# EAGLE board Board_PCB_v28 (EAGLE 9.7.0)
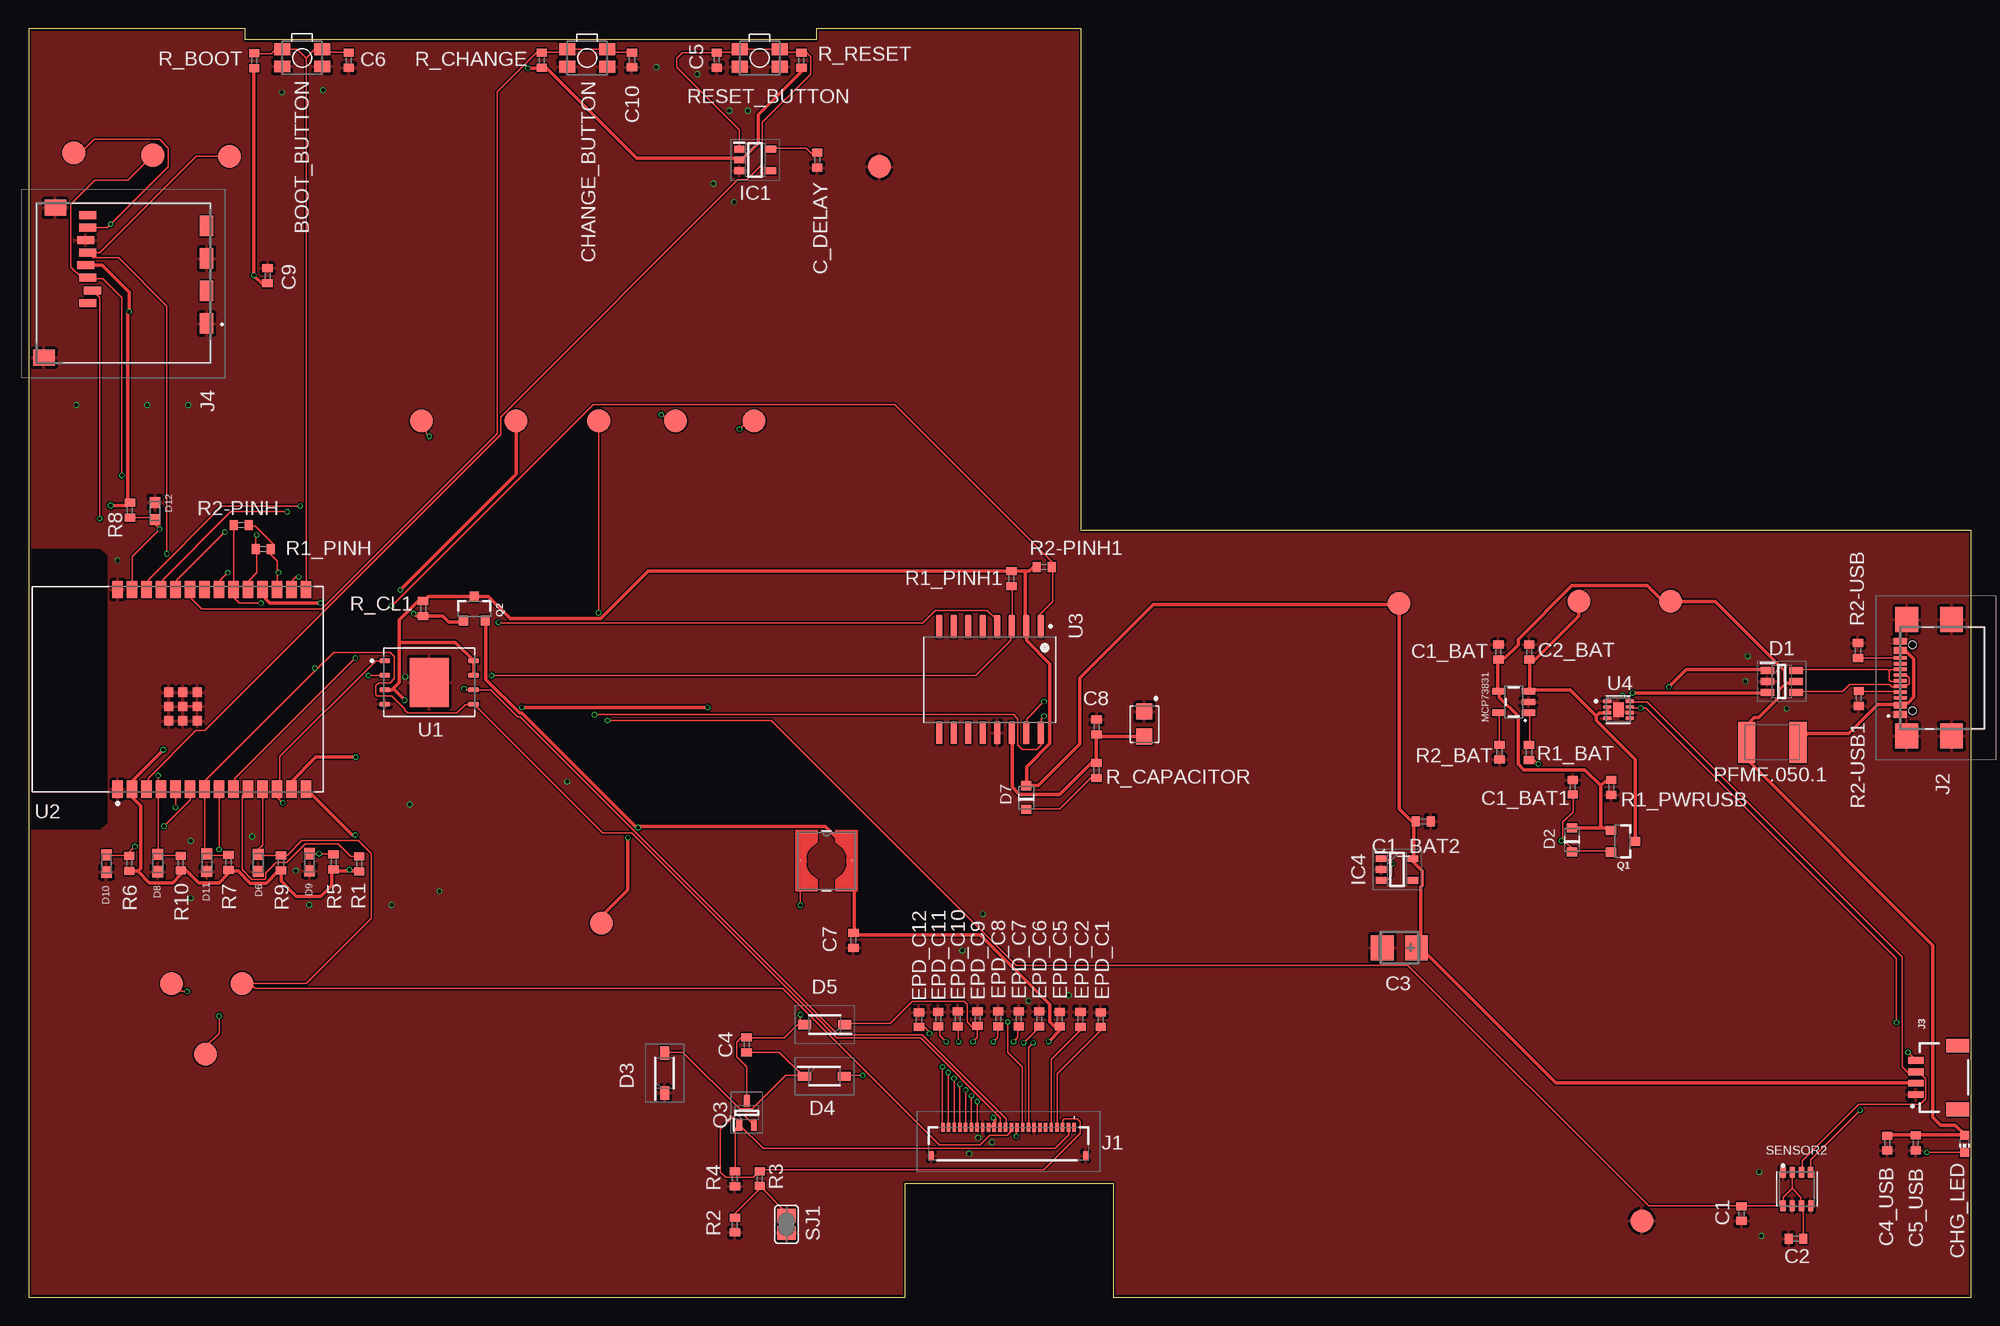
[diagram p0: board, top side]
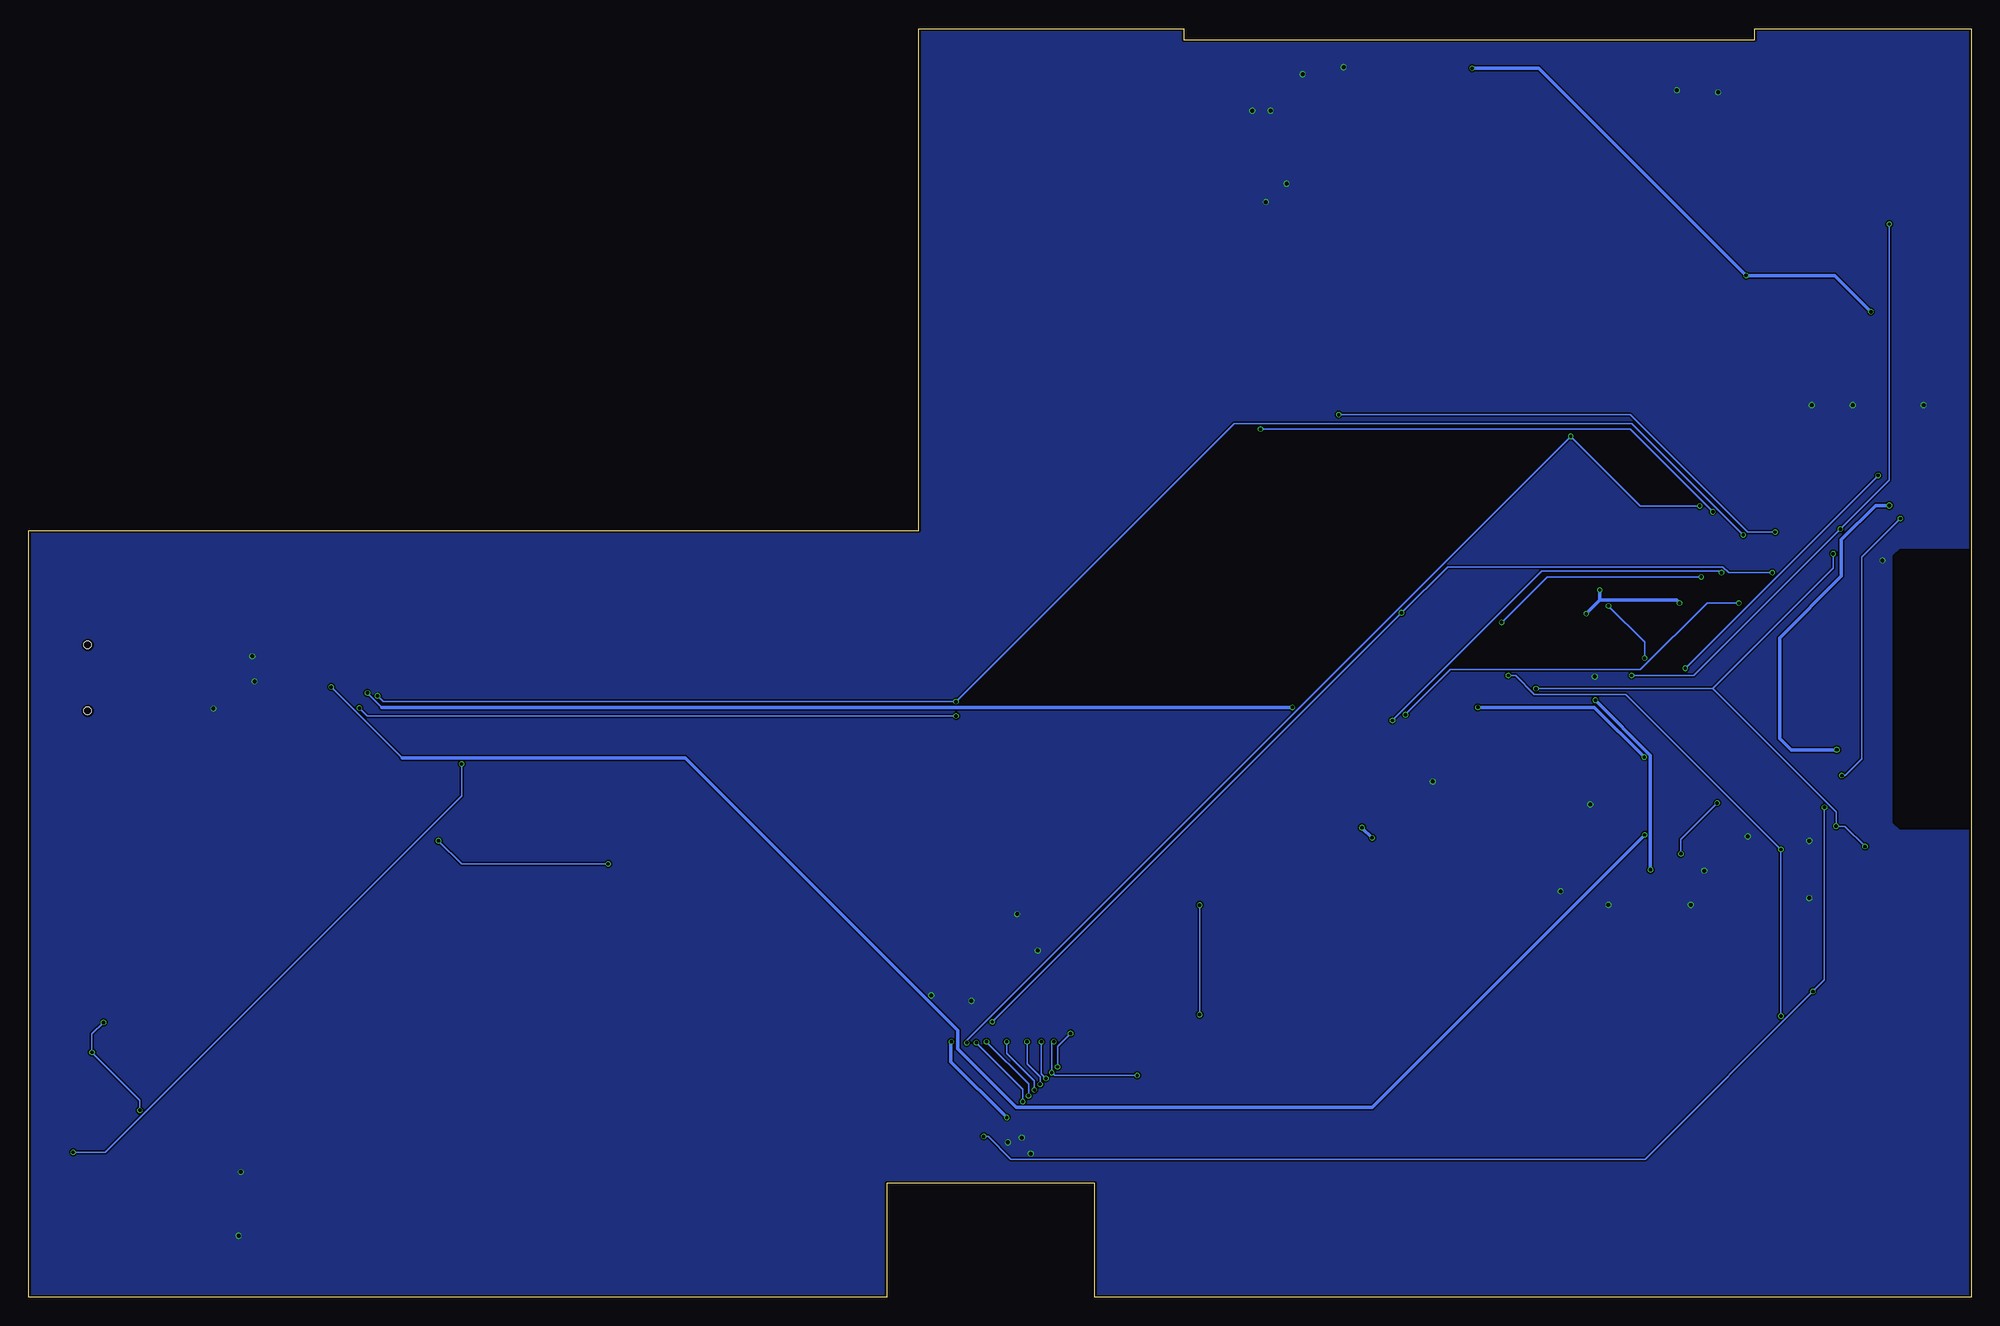
[diagram p1: board, bottom side, seen from below]

Size 170.2 x 111.2 mm. Coordinates in mm from the lower left corner, seen from the top.
Outline: 92.2,111.2 69,111.2 69,110.2 19,110.2 19,111.2 0,111.2 0,0 76.8,0 76.8,10 95,10 95,0 170.2,0 170.2,67.2 92.2,67.2 92.2,111.2
Copper layers (1*16): Top 0.035mm / dielectric 1.6mm / Bottom 0.035mm
Design rules "jlcpcb-2layers": minimum track width 5mil, minimum drill 0.3mm, track to track 5mil, track to pad 5mil, pad to pad 5mil, via to via 5mil, smd to smd 5mil, copper to edge 0.2mm, drill to drill 6mil, minimum pad ring 10mil, minimum via ring 3mil, stop-mask expansion 4mil, vias tented up to drill 0mil, thermal gap 10mil

## Footprints (pad centres in the part's own frame; a part is rotated, then mirrored left to right if it is on the bottom)
MYBUTTON = smd 1.4 x 1.05: 1 1.75,0.75; 2 -1.75,0.75; 3 -1.75,-0.75; 4 1.75,-0.75
EAGLE-LTSPICE_C0402 = smd 0.7 x 0.9: 1 -0.65,0; 2 0.65,0
RCL_CT3528 = smd 2 x 2.2: + -1.5,0; - 1.5,0
CAPCP3225X100N = smd 1.4 x 1.4: 1 -1.1,0; 2 1.1,0
ADAFRUIT_CHIP-LED0603 = smd 0.8 x 0.8: A 0,-0.75; C 0,0.75
SOT95P280X145-6N = smd 1.2 x 0.6: 1 -1.25,0.95; 2 -1.25,0; 3 -1.25,-0.95; 4 1.25,-0.95; 5 1.25,0; 6 1.25,0.95
ESP32_WROVER_AVX---SD0805S020S1R0_AVX_SD0805S020S1R0_0 = smd 0.8 x 0.9: 1 -1.05,0; 2 1.05,0
SOD3716X135N = smd 1.15 x 0.8: 1 -1.75,0; 2 1.75,0
DIOC1608X36N = smd 0.97 x 0.94: 1 -0.75,0; 2 0.75,0
SOT95P280X125-5N = smd 0.9 x 0.6: 1 -1.4,0.95; 2 -1.4,0; 3 -1.4,-0.95; 4 1.4,-0.95; 5 1.4,0.95
SOT95P280X120-5N = smd 0.9 x 0.6: 1 -1.4,0.95; 2 -1.4,0; 3 -1.4,-0.95; 4 1.4,-0.95; 5 1.4,0.95
FH34SRJ24S05SH99 = smd 0.3 x 0.8: 1 5.75,1.45; 2 5.25,1.45; 3 4.75,1.45; 4 4.25,1.45; 5 3.75,1.45; 6 3.25,1.45; 7 2.75,1.45; 8 2.25,1.45; 9 1.75,1.45; 10 1.25,1.45; 11 0.75,1.45; 12 0.25,1.45; 13 -0.25,1.45; 14 -0.75,1.45; 15 -1.25,1.45; 16 -1.75,1.45; 17 -2.25,1.45; 18 -2.75,1.45; 19 -3.25,1.45; 20 -3.75,1.45; 21 -4.25,1.45; 22 -4.75,1.45; 23 -5.25,1.45; 24 -5.75,1.45 | smd 0.4 x 0.8: MP1 6.75,-1.05; MP2 -6.75,-1.05
SAMACSYS_PARTS_USB4110GFA = smd 0.3 x 1.15: A1 -3.35,3.678; A4 -2.55,3.678; A5 -1.25,3.678; A6 -0.25,3.678; A7 0.25,3.678; A8 1.25,3.678; A9 2.55,3.678; A12 3.35,3.678; B1 3.05,3.678; B4 2.25,3.678; B5 1.75,3.678; B6 0.75,3.678; B7 -0.75,3.678; B8 -1.75,3.678; B9 -2.25,3.678; B12 -3.05,3.678 | smd 2.18 x 2: MP1 -5.11,-0.827; MP2 5.11,-0.827; MP3 -5.11,3.103; MP4 5.11,3.103 | hole 0.65: -2.89,2.603; 2.89,2.603
JST04_1MM_RA = smd 0.6 x 1.35: 1 -1.5,0; 2 -0.5,0; 3 0.5,0; 4 1.5,0 | smd 1.2 x 2: NC1 2.8,-3.675; NC2 -2.8,-3.675
112ATAARR03ATTEND = smd 1.8 x 1.2: G1 10.6,10.4; G2 4.9,10.4; S1 7.75,10.4; S2 2.05,10.4 | smd 1.4 x 1.9: G3 13.6,-3.85; G4 0.45,-2.85 | smd 0.7 x 1.5: P1 8.8,0; P2 7.7,0.4; P3 6.6,0; P4 5.5,-0.2; P5 4.4,0; P6 3.3,-0.2; P7 2.2,0; P8 1.1,0
IND_4828-WE-TPC_WRE = smd 0.127 x 0.127: 1 -2.286,0; 2 2.286,0
ESP32_WROVER_SPARKFUN-IC-POWER_SOT23-5 = smd 0.55 x 1.2: 1 -0.95,-1.3; 2 0,-1.3; 3 0.95,-1.3; 4 0.95,1.3; 5 -0.95,1.3
ESP32C6_VARISTOR_CT/CN1812 = smd 1.5 x 3.6: 1 -2.25,0; 2 2.25,0
ESP32_WROVER_SPARKFUN-DISCRETESEMI_SOT23-3 = smd 0.8 x 0.9: 1 -0.95,-1; 2 0.95,-1; 3 0,1.1
SOT65P210X110-3N = smd 1.05 x 0.5: 1 -1.05,0.65; 2 -1.05,-0.65; 3 1.05,0
ESP32_WROVER_EAGLE-LTSPICE_R0402 = smd 0.7 x 0.9: 1 -0.65,0; 2 0.65,0
ESP32_WROVER_BME680_PSON80P300X300X100-8N = smd 1.016 x 0.5: 1 1.458,1.2; 2 1.458,0.4; 3 1.458,-0.4; 4 1.458,-1.2; 5 -1.458,-1.22; 6 -1.458,-0.4; 7 -1.458,0.4; 8 -1.458,1.2
SJ = smd 1.168 x 1.6: 1 -0.762,0; 2 0.762,0
TP20R = smd 2 x 2: TP 0,0
SON127P600X800X80-9N = smd 0.94 x 0.44: 1 -3.895,1.905; 2 -3.895,0.635; 3 -3.895,-0.635; 4 -3.895,-1.905; 5 3.895,-1.905; 6 3.895,-0.635; 7 3.895,0.635; 8 3.895,1.905 | smd 3.4 x 4.3: 9 0,0
XCVR_ESP32-C6-WROOM-1-N8 = smd 1.5 x 0.9: 1 -8.75,5.26; 2 -8.75,3.99; 3 -8.75,2.72; 4 -8.75,1.45; 5 -8.75,0.18; 6 -8.75,-1.09; 7 -8.75,-2.36; 8 -8.75,-3.63; 9 -8.75,-4.9; 10 -8.75,-6.17; 11 -8.75,-7.44; 12 -8.75,-8.71; 13 -8.75,-9.98; 14 -8.75,-11.25; 15 8.75,-11.25; 16 8.75,-9.98; 17 8.75,-8.71; 18 8.75,-7.44; 19 8.75,-6.17; 20 8.75,-4.9; 21 8.75,-3.63; 22 8.75,-2.36; 23 8.75,-1.09; 24 8.75,0.18; 25 8.75,1.45; 26 8.75,2.72; 27 8.75,3.99; 28 8.75,5.26 | smd 0.8 x 0.8: 29_1 -2.755,0.79; 29_2 -1.505,0.79; 29_3 -0.255,0.79; 29_4 -2.755,-0.46; 29_5 -1.505,-0.46; 29_6 -0.255,-0.46; 29_7 -2.755,-1.71; 29_8 -1.505,-1.71; 29_9 -0.255,-1.71
SOIC127P1032X265-16N = smd 2.05 x 0.59: 1 -4.655,4.445; 2 -4.655,3.175; 3 -4.655,1.905; 4 -4.655,0.635; 5 -4.655,-0.635; 6 -4.655,-1.905; 7 -4.655,-3.175; 8 -4.655,-4.445; 9 4.655,-4.445; 10 4.655,-3.175; 11 4.655,-1.905; 12 4.655,-0.635; 13 4.655,0.635; 14 4.655,1.905; 15 4.655,3.175; 16 4.655,4.445
SON50P200X200X80-9N = smd 0.76 x 0.27: 1 -0.985,0.75; 2 -0.985,0.25; 3 -0.985,-0.25; 4 -0.985,-0.75; 5 0.985,-0.75; 6 0.985,-0.25; 7 0.985,0.25; 8 0.985,0.75 | smd 0.9 x 1.3: 9 0,0

## Placement (x,y rotation side)
BOOT_BUTTON  BUTTON_CUSYOMV1  [MYBUTTON]  23.97,108.62 180 top
C1  100nF  [EAGLE-LTSPICE_C0402]  150.06,7.35 90 top
C1_BAT  4.7uF  [EAGLE-LTSPICE_C0402]  128.76,56.56 270 top
C1_BAT1  4.7uF  [EAGLE-LTSPICE_C0402]  135.28,44.72 270 top
C1_BAT2  4.7uF  [EAGLE-LTSPICE_C0402]  122.18,41.72 180 top
C2  100nF  [EAGLE-LTSPICE_C0402]  154.83,5.14 0 top
C2_BAT  4.7uF  [EAGLE-LTSPICE_C0402]  131.46,56.55 270 top
C3  100uF TANT  [RCL_CT3528]  120.08,30.65 180 top
C4  4.7uF/25V  [EAGLE-LTSPICE_C0402]  62.9,22.15 270 top
C4_USB  100nF  [EAGLE-LTSPICE_C0402]  162.82,13.53 90 top
C5  1uF  [EAGLE-LTSPICE_C0402]  60.28,108.43 90 top
C5_USB  4.7uF  [EAGLE-LTSPICE_C0402]  165.32,13.54 90 top
C6  100nF  [EAGLE-LTSPICE_C0402]  28.06,108.41 90 top
C7  10uF  [EAGLE-LTSPICE_C0402]  72.26,31.3 90 top
C8  100nF  [EAGLE-LTSPICE_C0402]  93.56,49.99 90 top
C9  100nF  [EAGLE-LTSPICE_C0402]  20.94,89.53 270 top
C10  100nF  [EAGLE-LTSPICE_C0402]  52.86,108.45 90 top
C10_SUPERCAP  CPH3225A  [CAPCP3225X100N]  97.75,50.24 270 top
C_DELAY  100nF  [EAGLE-LTSPICE_C0402]  69.1,99.67 90 top
CHANGE_BUTTON  BUTTON_CUSYOMV1  [MYBUTTON]  48.93,108.62 180 top
CHG_LED  [ADAFRUIT_CHIP-LED0603]  169.6,13.46 180 top
D1  USBLC6-2SC6Y  [SOT95P280X145-6N]  153.58,53.98 0 top
D2  ESP32_WROVER_AVX---SD0805S020S1R0_AVX_SD0805S020S1R0_0_0AVX_SD0805S020S1R0_0_0  [ESP32_WROVER_AVX---SD0805S020S1R0_AVX_SD0805S020S1R0_0]  135.21,40.09 90 top
D3  MBR0530  [SOD3716X135N]  55.72,19.66 90 top
D4  MBR0530  [SOD3716X135N]  69.72,19.39 0 top
D5  MBR0530  [SOD3716X135N]  69.74,23.91 180 top
D6  PGB1010603MR  [DIOC1608X36N]  20.12,38.08 90 top
D7  ESP32_WROVER_AVX---SD0805S020S1R0_AVX_SD0805S020S1R0_0_0AVX_SD0805S020S1R0_0_0  [ESP32_WROVER_AVX---SD0805S020S1R0_AVX_SD0805S020S1R0_0]  87.4,43.8 90 top
D8  PGB1010603MR  [DIOC1608X36N]  11.32,38.06 90 top
D9  PGB1010603MR  [DIOC1608X36N]  24.62,38.14 90 top
D10  PGB1010603MR  [DIOC1608X36N]  6.82,38.02 90 top
D11  PGB1010603MR  [DIOC1608X36N]  15.62,38.1 90 top
D12  PGB1010603MR  [DIOC1608X36N]  11.08,68.92 270 top
EPD_C1  1uF/50V  [EAGLE-LTSPICE_C0402]  93.92,24.35 90 top
EPD_C2  1uF/50V  [EAGLE-LTSPICE_C0402]  92.14,24.38 90 top
EPD_C5  1uF/50V  [EAGLE-LTSPICE_C0402]  90.34,24.39 90 top
EPD_C6  1uF/50V  [EAGLE-LTSPICE_C0402]  88.54,24.4 90 top
EPD_C7  1uF/50V  [EAGLE-LTSPICE_C0402]  86.74,24.41 90 top
EPD_C8  1uF/50V  [EAGLE-LTSPICE_C0402]  84.94,24.42 90 top
EPD_C9  1uF/50V  [EAGLE-LTSPICE_C0402]  83.14,24.43 90 top
EPD_C10  1uF/50V  [EAGLE-LTSPICE_C0402]  81.4,24.41 90 top
EPD_C11  1uF/50V  [EAGLE-LTSPICE_C0402]  79.7,24.39 90 top
EPD_C12  1uF/50V  [EAGLE-LTSPICE_C0402]  78,24.35 90 top
IC1  BD5229G-TR  [SOT95P280X125-5N]  63.65,99.68 0 top
IC4  XC6220A331MR-G  [SOT95P280X120-5N]  119.88,37.5 0 top
J1  FH34SRJ-24S-0.5SH_99_  [FH34SRJ24S05SH99]  85.84,13.45 0 top
J2  SAMACSYS_PARTS_USB4110-GF-A  [SAMACSYS_PARTS_USB4110GFA]  167.63,54.3 90 top
J3  QWIIC_RIGHT_ANGLE  [JST04_1MM_RA]  165.32,19.28 90 top
J4  112A-TAAR-R03_ATTEND  [112ATAARR03ATTEND]  5.2,95.95 270 top
L1  744043680IND_4828-WE-TPC_WRE  [IND_4828-WE-TPC_WRE]  69.9,38.26 0 top
MCP73831  ESP32_WROVER_SPARKFUN-IC-POWER_MCP73831  [ESP32_WROVER_SPARKFUN-IC-POWER_SOT23-5]  130.1,52.18 90 top
PFMF.050.1  ESP32C6_VARISTORCN1812  [ESP32C6_VARISTOR_CT/CN1812]  152.75,48.65 180 top
Q1  20V/4.2A/52mΩ/1.4W  [ESP32_WROVER_SPARKFUN-DISCRETESEMI_SOT23-3]  139.62,39.97 270 top
Q2  20V/4.2A/52mΩ/1.4W  [ESP32_WROVER_SPARKFUN-DISCRETESEMI_SOT23-3]  39.05,60.32 0 top
Q3  SI1308EDL-T1-GE3  [SOT65P210X110-3N]  62.91,16.19 90 top
R1  10K  [ESP32_WROVER_EAGLE-LTSPICE_R0402]  28.98,37.99 90 top
R1_BAT  200  [ESP32_WROVER_EAGLE-LTSPICE_R0402]  131.44,47.76 90 top
R1_PINH  10K  [ESP32_WROVER_EAGLE-LTSPICE_R0402]  20.56,65.58 0 top
R1_PINH1  10K  [ESP32_WROVER_EAGLE-LTSPICE_R0402]  86.1,63.01 90 top
R1_PWRUSB  100K  [ESP32_WROVER_EAGLE-LTSPICE_R0402]  138.65,44.68 270 top
R2  2.2  [ESP32_WROVER_EAGLE-LTSPICE_R0402]  61.88,6.35 90 top
R2-PINH  10K  [ESP32_WROVER_EAGLE-LTSPICE_R0402]  18.62,67.68 0 top
R2-PINH1  10K  [ESP32_WROVER_EAGLE-LTSPICE_R0402]  88.97,64 180 top
R2-USB  5k1  [ESP32_WROVER_EAGLE-LTSPICE_R0402]  160.26,56.69 90 top
R2-USB1  5k1  [ESP32_WROVER_EAGLE-LTSPICE_R0402]  160.32,52.5 90 top
R2_BAT  2k  [ESP32_WROVER_EAGLE-LTSPICE_R0402]  128.86,47.78 90 top
R3  0.47  [ESP32_WROVER_EAGLE-LTSPICE_R0402]  64.06,10.42 90 top
R4  10K  [ESP32_WROVER_EAGLE-LTSPICE_R0402]  61.88,10.41 90 top
R5  10K  [ESP32_WROVER_EAGLE-LTSPICE_R0402]  26.72,38.17 270 top
R6  10K  [ESP32_WROVER_EAGLE-LTSPICE_R0402]  8.82,38.05 270 top
R7  10K  [ESP32_WROVER_EAGLE-LTSPICE_R0402]  17.52,38.13 270 top
R8  10K  [ESP32_WROVER_EAGLE-LTSPICE_R0402]  8.88,68.99 90 top
R9  10K  [ESP32_WROVER_EAGLE-LTSPICE_R0402]  22.12,38.09 270 top
R10  10K  [ESP32_WROVER_EAGLE-LTSPICE_R0402]  13.34,38.06 270 top
R_BOOT  10K  [ESP32_WROVER_EAGLE-LTSPICE_R0402]  19.78,108.39 270 top
R_CAPACITOR  15  [ESP32_WROVER_EAGLE-LTSPICE_R0402]  93.55,46.18 270 top
R_CHANGE  10K  [ESP32_WROVER_EAGLE-LTSPICE_R0402]  44.95,108.41 270 top
R_CL1  10K  [ESP32_WROVER_EAGLE-LTSPICE_R0402]  34.56,60.37 90 top
R_RESET  10K  [ESP32_WROVER_EAGLE-LTSPICE_R0402]  67.7,108.41 270 top
RESET_BUTTON  BUTTON_CUSYOMV1  [MYBUTTON]  64.04,108.62 180 top
SENSOR2  ESP32_WROVER_BME680_BME680  [ESP32_WROVER_BME680_PSON80P300X300X100-8N]  154.9,9.5 90 top
SJ1  [SJ]  66.4,6.41 90 top
TP1  TPTP20R  [TP20R]  63.56,76.8 0 top
TP2  TPTP20R  [TP20R]  56.68,76.8 0 top
TP3  TPTP20R  [TP20R]  135.8,61 0 top
TP4  TPTP20R  [TP20R]  141.32,6.7 0 top
TP5  TPTP20R  [TP20R]  74.54,99.1 0 top
TP6  TPTP20R  [TP20R]  3.96,100.3 0 top
TP7  TPTP20R  [TP20R]  10.88,100.1 0 top
TP8  TPTP20R  [TP20R]  17.6,100 0 top
TP9  TPTP20R  [TP20R]  34.42,76.8 0 top
TP10  TPTP20R  [TP20R]  18.7,27.52 0 top
TP11  TPTP20R  [TP20R]  12.54,27.5 0 top
TP12  TPTP20R  [TP20R]  49.95,76.82 0 top
TP13  TPTP20R  [TP20R]  42.7,76.82 0 top
TP14  TPTP20R  [TP20R]  143.85,61.02 0 top
TP15  TPTP20R  [TP20R]  15.5,21.32 0 top
TP16  TPTP20R  [TP20R]  120.05,60.82 0 top
TP17  TPTP20R  [TP20R]  50.19,32.8 0 top
U1  W25Q512JVEIQ  [SON127P600X800X80-9N]  35.1,53.9 0 top
U2  ESP32-C6-WROOM-1-N8  [XCVR_ESP32-C6-WROOM-1-N8]  13.06,53.29 90 top
U3  DS3231SN#  [SOIC127P1032X265-16N]  84.21,54.14 270 top
U4  MAX17048G+T10  [SON50P200X200X80-9N]  139.27,51.5 0 top

## Library data of the parts
BOOT_BUTTON CHANGE_BUTTON CHG_LED PFMF.050.1 RESET_BUTTON SJ1 TP1-TP17 = DeskAssistant v19 v1
C1 C1_BAT C1_BAT1 C1_BAT2 C2 C2_BAT C4 C4_USB C5 C5_USB C6-C10 C_DELAY EPD_C1 EPD_C2 EPD_C5-EPD_C12 = DeskAssistant v19 v1; SPICEMODEL: NONE; SPICEPREFIX: C
C3 = DeskAssistant v19 v1; SPICEPREFIX: C
C10_SUPERCAP = DeskAssistant v19 v1; AVAILABILITY: Not in stock; CHECK_PRICES: https://www.snapeda.com/parts/CPH3225A/Seiko+Instruments/view-part/?ref=eda; DESCRIPTION: 11 mF (EDLC) Supercapacitor 3.3 V 1210 (3225 Metric) - -; MF: Seiko Instruments; MP: CPH3225A; PACKAGE: 1210 Seiko; PRICE: None; PURCHASE-URL: https://www.snapeda.com/api/url_track_click_mouser/?unipart_id=562593&manufacturer=Seiko Instruments&part_name=CPH3225A&search_term=None; SNAPEDA_LINK: https://www.snapeda.com/parts/CPH3225A/Seiko+Instruments/view-part/?ref=snap
D1 = DeskAssistant v19 v1; AVAILABILITY: In Stock; CHECK_PRICES: https://www.snapeda.com/parts/USBLC6-2SC6Y/STMicroelectronics/view-part/?ref=eda; DESCRIPTION: 17V Clamp 5A (8/20µs) Ipp Tvs Diode Surface Mount SOT-23-6; MF: STMicroelectronics; MP: USBLC6-2SC6Y; PACKAGE: SOT-23-6 STMicroelectronics; PRICE: None; SNAPEDA_LINK: https://www.snapeda.com/parts/USBLC6-2SC6Y/STMicroelectronics/view-part/?ref=snap
D2 = DeskAssistant v19 v1; CENTROID_NOT_SPECIFIED: No; DATASHEET: http://datasheets.avx.com/schottky.pdf; DIGIKEY_DESCRIPTION: DIODE SCHOTTKY 20V 1A 0805; DIGIKEY_PART_NUMBER: 478-7800-1-ND; LEAD_FREE: yes; MF: AVX; MOUSER_PART_NUMBER: 581-SD0805S020S1R0; PACKAGE: 0805 (2012 metric); PREFIX: D; ROHS: yes; SD0805S020S1R0: SD0805S020S1R0; TEMPERATURE_RANGE_HIGH: +125°C; TEMPERATURE_RANGE_LOW: -55°C
D3-D5 = DeskAssistant v19 v1; AVAILABILITY: In Stock; CHECK_PRICES: https://www.snapeda.com/parts/MBR0530/Onsemi/view-part/?ref=eda; DESCRIPTION: Diode Schottky 30 V 500mA Surface Mount SOD-123; MF: ON Semiconductor; MP: MBR0530; PACKAGE: SOD-123-2 ON Semiconductor; PRICE: None; PURCHASE-URL: https://www.snapeda.com/api/url_track_click_mouser/?unipart_id=179458&manufacturer=ON Semiconductor&part_name=MBR0530&search_term=None; SNAPEDA_LINK: https://www.snapeda.com/parts/MBR0530/Onsemi/view-part/?ref=snap
D6 D8-D12 = DeskAssistant v19 v1; AVAILABILITY: In Stock; CHECK_PRICES: https://www.snapeda.com/parts/PGB1010603MR/Littelfuse/view-part/?ref=eda; DESCRIPTION: 150V (Typ) Clamp - Ipp Tvs Diode Surface Mount 0603 (1608 Metric); MF: Littelfuse Inc.; MP: PGB1010603MR; PACKAGE: 0603 Littelfuse Inc.; PRICE: None; PURCHASE-URL: https://www.snapeda.com/api/url_track_click_mouser/?unipart_id=5659453&manufacturer=Littelfuse Inc.&part_name=PGB1010603MR&search_term=None; SNAPEDA_LINK: https://www.snapeda.com/parts/PGB1010603MR/Littelfuse/view-part/?ref=snap
D7 = DeskAssistant v19 v1; CENTROID_NOT_SPECIFIED: No; DATASHEET: http://datasheets.avx.com/schottky.pdf; DIGIKEY_DESCRIPTION: DIODE SCHOTTKY 20V 1A 0805; DIGIKEY_PART_NUMBER: 478-7800-1-ND; DIODE: SD0805S020S1R0; LEAD_FREE: yes; MF: AVX; MOUSER_PART_NUMBER: 581-SD0805S020S1R0; PACKAGE: 0805 (2012 metric); PREFIX: D; ROHS: yes; TEMPERATURE_RANGE_HIGH: +125°C; TEMPERATURE_RANGE_LOW: -55°C
IC1 = DeskAssistant v19 v1; DESCRIPTION: Voltage Detector with Adjustable Delay Time: CMOS processes are utilized to develop high precision, low current consumption CMOS reset ICs that allow arbitrary setting of the delay time. The extensive lineup includes both Nch Open Drain and CMOS output types in a wide range of detection voltages (from 2.3V to 6.0V, in 0.1V steps), enabling selection of the ideal solution based on customer requirements. In addition, the entire series is of course both lead-free and RoHS-compliant.; HEIGHT: 1.25mm; MANUFACTURER_NAME: ROHM Semiconductor; MANUFACTURER_PART_NUMBER: BD5229G-TR; MOUSER_PART_NUMBER: 755-BD5229G-TR; MOUSER_PRICE-STOCK: https://www.mouser.co.uk/ProductDetail/ROHM-Semiconductor/BD5229G-TR?qs=4kLU8WoGk0vvnhrrYwdszw%3D%3D
IC4 = DeskAssistant v19 v1; DESCRIPTION: LDO Voltage Regulators; HEIGHT: 1.2mm; MANUFACTURER_NAME: Torex; MANUFACTURER_PART_NUMBER: XC6220A331MR-G; MOUSER_PART_NUMBER: 865-XC6220A331MR-G; MOUSER_PRICE-STOCK: https://www.mouser.co.uk/ProductDetail/Torex-Semiconductor/XC6220A331MR-G?qs=AsjdqWjXhJ8ZSWznL1J0gg%3D%3D
J1 = DeskAssistant v19 v1; DESCRIPTION: 24 Position FFC, FPC Connector Contacts, Top and Bottom 0.020" (0.50mm) Surface Mount, Right Angle; HEIGHT: 1.1mm; MANUFACTURER_NAME: Hirose; MANUFACTURER_PART_NUMBER: FH34SRJ-24S-0.5SH(99); MOUSER_PART_NUMBER: 798-FH34SRJ24S05SH99; MOUSER_PRICE-STOCK: https://www.mouser.co.uk/ProductDetail/Hirose-Connector/FH34SRJ-24S-0.5SH99?qs=vcbW%252B4%252BSTIpKBl5ap9J8Fw%3D%3D
J2 = DeskAssistant v19 v1; DESCRIPTION: CONN USB 2.0 TYPE-C R/A SMT; HEIGHT: 3.26mm; MANUFACTURER_NAME: GCT (GLOBAL CONNECTOR TECHNOLOGY); MANUFACTURER_PART_NUMBER: USB4110-GF-A; MOUSER_PART_NUMBER: 640-USB4110-GF-A; MOUSER_PRICE-STOCK: https://www.mouser.co.uk/ProductDetail/GCT/USB4110-GF-A?qs=KUoIvG%2F9IlYiZvIXQjyJeA%3D%3D
J3 = DeskAssistant v19 v1; PROD_ID: CONN-13694
J4 = DeskAssistant v19 v1; DESCRIPTION: Micro SD Card Socket, Push-Push Type, Top Mount, SMT, H=1.83mm, 10u; HEIGHT: 1.9mm; MANUFACTURER_NAME: ATTEND; MANUFACTURER_PART_NUMBER: 112A-TAAR-R03 ATTEND
L1 = DeskAssistant v19 v1; COPYRIGHT: Copyright (C) 2024 Ultra Librarian. All rights reserved.; L1: 68uH; MANUFACTURER_PART_NUMBER: 744043680; MFR_NAME: Wurth Electronics
MCP73831 = DeskAssistant v19 v1; PROD_ID: IC-09995
Q1 = DeskAssistant v19 v1; DMG2305UX-7: DMG2305UX-7; PROD_ID: TRAN-14388
Q2 = DeskAssistant v19 v1; PROD_ID: TRAN-14388
Q3 = DeskAssistant v19 v1; AVAILABILITY: In Stock; CHECK_PRICES: https://www.snapeda.com/parts/SI1308EDL-T1-GE3/Vishay+Siliconix/view-part/?ref=eda; DESCRIPTION: Si1308EDL-T1-GE3 N-channel MOSFET Transistor, 1.5 A, 30 V, 3-Pin SC-70 | Siliconix / Vishay SI1308EDL-T1-GE3; MF: Vishay Siliconix; MP: SI1308EDL-T1-GE3; PACKAGE: SOT-323 Vishay Semiconductor; PRICE: None; PURCHASE-URL: https://www.snapeda.com/api/url_track_click_mouser/?unipart_id=274603&manufacturer=Vishay Siliconix&part_name=SI1308EDL-T1-GE3&search_term=None; SNAPEDA_LINK: https://www.snapeda.com/parts/SI1308EDL-T1-GE3/Vishay+Siliconix/view-part/?ref=snap
R1 R1_BAT R1_PINH R1_PINH1 R1_PWRUSB R2 R2-PINH R2-PINH1 R2-USB R2-USB1 R2_BAT R3-R10 R_BOOT R_CAPACITOR R_CHANGE R_CL1 R_RESET = DeskAssistant v19 v1; SPICEMODEL: NONE; SPICEPREFIX: R
SENSOR2 = DeskAssistant v19 v1; AVAILABILITY: Unavailable; DESCRIPTION: Integrated Environmental Unit; MF: Bosch Sensortec; MP: BME680; MP1: BME688; PACKAGE: LGA-8 Bosch Tools; PRICE: None
U1 = DeskAssistant v19 v1; AVAILABILITY: In Stock; CHECK_PRICES: https://www.snapeda.com/parts/W25Q512JVEIQ/Winbond+Electronics/view-part/?ref=eda; DESCRIPTION: FLASH - NOR Memory IC 512Mb (64M x 8) SPI - Quad I/O 133 MHz 8-WSON (8x6); MF: Winbond Electronics; MP: W25Q512JVEIQ; PACKAGE: Package; PRICE: None; SNAPEDA_LINK: https://www.snapeda.com/parts/W25Q512JVEIQ/Winbond+Electronics/view-part/?ref=snap
U2 = DeskAssistant v19 v1; AVAILABILITY: In Stock; CHECK_PRICES: https://www.snapeda.com/parts/ESP32-C6-WROOM-1-N8/Espressif+Systems/view-part/?ref=eda; DESCRIPTION: Multiprotocol Modules ESP32-C6 module, Wi-Fi 6 in 2.4 GHz band, Bluetooth 5, Zigbee 3.0 and Thread. ESP34-WROOM Compatible - ENGINEERING SAMPLE; MF: Espressif Systems; MP: ESP32-C6-WROOM-1-N8; PACKAGE: None; PRICE: None; SNAPEDA_LINK: https://www.snapeda.com/parts/ESP32-C6-WROOM-1-N8/Espressif+Systems/view-part/?ref=snap
U3 = DeskAssistant v19 v1; AVAILABILITY: In Stock; CHECK_PRICES: https://www.snapeda.com/parts/DS3231SN%23/Analog+Devices/view-part/?ref=eda; DESCRIPTION: Extremely Accurate I²C-Integrated RTC/TCXO/Crystal; MF: Analog Devices; MP: DS3231SN#; PACKAGE: SOIC-16 Maxim; PRICE: None; PURCHASE-URL: https://www.snapeda.com/api/url_track_click_mouser/?unipart_id=99048&manufacturer=Analog Devices&part_name=DS3231SN#&search_term=None; SNAPEDA_LINK: https://www.snapeda.com/parts/DS3231SN%23/Analog+Devices/view-part/?ref=snap
U4 = DeskAssistant v19 v1; AVAILABILITY: In Stock; CHECK_PRICES: https://www.snapeda.com/parts/MAX17048G+T10/Analog+Devices/view-part/?ref=eda; DESCRIPTION: 3µA 1-Cell/2-Cell Fuel Gauge with ModelGauge; MF: Analog Devices; MP: MAX17048G+T10; PACKAGE: TDFN-8 Maxim; PRICE: None; PURCHASE-URL: https://www.snapeda.com/api/url_track_click_mouser/?unipart_id=329239&manufacturer=Analog Devices&part_name=MAX17048G+T10&search_term=None; SNAPEDA_LINK: https://www.snapeda.com/parts/MAX17048G+T10/Analog+Devices/view-part/?ref=snap

## Nets
3V3: C1_BAT2.2 C3.+ C9.2 D7.2 IC1.2 IC4.5 J3.2 J4.P4 Q2.3 R1.1 R1_PINH1.2 R2-PINH1.2 R5.2 R6.2 R7.2 R8.2 R9.2 R10.2 R_BOOT.2 R_CHANGE.2 R_CL1.2 R_RESET.2 TP16.TP U1.3 U1.7 U1.8 U2.2 U3.2
32KHZ: R2-PINH1.1 U2.9 U3.1
DN: D1.4 J2.A7 J2.B7
DP: D1.6 J2.A6 J2.B6
EPD_3V3: C7.2 EPD_C5.1 J1.15 J1.16 L1.2 Q2.2 TP17.TP
EPD_3V3_C: Q2.1 R_CL1.1 TP13.TP U2.18
EPD_BUSY: J1.9 TP9.TP U2.26
EPD_CS: D6.2 J1.12 R9.1 TP10.TP U2.11
EPD_DC: J1.11 TP11.TP U2.5
EPD_RST: J1.10 TP12.TP U2.21
FLASH_CS: D9.2 R5.1 U1.1 U2.12
GDR: J1.2 Q3.1 R4.2
GND: BOOT_BUTTON.1 BOOT_BUTTON.2 C1.1 C1_BAT1.1 C1_BAT2.1 C1_BAT.1 C2.1 C2_BAT.1 C3.- C4_USB.1 C5.1 C5_USB.1 C6.1 C7.1 C8.2 C9.1 C10.1 C10_SUPERCAP.1 C_DELAY.1 CHANGE_BUTTON.1 CHANGE_BUTTON.2 D1.2 D3.1 D6.1 D8.1 D9.1 D10.1 D11.1 D12.1 EPD_C1.2 EPD_C2.2 EPD_C5.2 EPD_C6.2 EPD_C7.2 EPD_C8.2 EPD_C9.2 EPD_C10.2 EPD_C11.2 EPD_C12.2 IC1.3 IC4.2 J1.8 J1.17 J1.MP1 J1.MP2 J2.A1 J2.A12 J2.B1 J2.B12 J2.MP1 J2.MP2 J2.MP3 J2.MP4 J3.1 J4.G1 J4.G2 J4.G3 J4.G4 J4.P6 MCP73831.2 R1_PWRUSB.2 R2-USB1.1 R2-USB.2 R2.1 R2_BAT.1 R4.1 RESET_BUTTON.1 RESET_BUTTON.2 SENSOR2.1 SENSOR2.5 SENSOR2.7 SJ1.1 TP4.TP TP5.TP U1.4 U1.9 U2.1 U2.28 U2.29_1 U2.29_2 U2.29_3 U2.29_4 U2.29_5 U2.29_6 U2.29_7 U2.29_8 U2.29_9 U3.13 U4.1 U4.4 U4.6 U4.9
GPIO8: R1.2 U2.10
I2C_PW: C1.2 C2.2 R1_PINH.2 R2-PINH.2 SENSOR2.2 SENSOR2.6 SENSOR2.8 U2.17
INT_RTC: R1_PINH1.1 TP15.TP U2.8 U3.3
IO/BOOT: BOOT_BUTTON.3 BOOT_BUTTON.4 C6.2 R_BOOT.1 U2.15
IO/CHANGE: C10.2 CHANGE_BUTTON.3 CHANGE_BUTTON.4 R_CHANGE.1 U2.23
MISO: D12.2 J4.P7 R8.1 TP6.TP U1.2 U2.27
MOSI: D11.2 J1.14 J4.P3 R7.1 TP7.TP U1.5 U2.7
N$1: J2.A5 R2-USB1.2
N$2: J2.B5 R2-USB.1
N$3: C1_BAT1.2 D2.1 IC4.1 IC4.3 Q1.2
N$5: C4.2 D3.2 D4.1
N$6: CHG_LED.C R1_BAT.1
N$7: MCP73831.1 R1_BAT.2
N$8: MCP73831.5 R2_BAT.2
N$9: EPD_C12.1 J1.24
N$10: C_DELAY.2 IC1.5
N$11: EPD_C2.1 J1.5
N$12: EPD_C10.1 J1.22
N$14: EPD_C8.1 J1.20
N$15: EPD_C7.1 J1.19
N$16: EPD_C6.1 J1.18
N$18: EPD_C1.1 J1.4
N$23: D7.1 R_CAPACITOR.2
PREVGH: D5.1 EPD_C9.1 J1.21
PREVGL: D4.2 EPD_C11.1 J1.23
RESE: J1.3 Q3.2 R3.2
RESE': R2.2 R3.1 SJ1.2
RESET: C5.2 IC1.1 R_RESET.1 RESET_BUTTON.3 RESET_BUTTON.4 U2.3
RTC_RST: U2.16 U3.4
RX: TP2.TP U2.24
SCK: D10.2 J1.13 J4.P5 R6.1 TP8.TP U1.6 U2.6
SCL: J3.4 R2-PINH.1 SENSOR2.4 U2.20 U3.16 U4.7
SDA: J3.3 R1_PINH.1 SENSOR2.3 U2.19 U3.15 U4.8
SRC: C4.1 D5.2 L1.1 Q3.3
SS_SD: D8.2 J4.P2 R10.1 U2.4
TX: TP1.TP U2.25
USB_D+: D1.1 U2.14
USB_D-: D1.3 U2.13
VBAT: C2_BAT.2 MCP73831.3 Q1.3 TP3.TP U4.2 U4.3
VBUS: C1_BAT.2 C4_USB.2 C5_USB.2 CHG_LED.A D1.5 D2.2 MCP73831.4 PFMF.050.1.2 Q1.1 R1_PWRUSB.1 TP14.TP
VRTC: C8.1 C10_SUPERCAP.2 R_CAPACITOR.1 U3.14
VUSB: J2.A4 J2.A9 J2.B4 J2.B9 PFMF.050.1.1

## Tracks (layer width: path | path; a pad name or v marks a point on that pad's centre or on a via)
3V3  (via drill 0.3, 0.35)
  Top 0.305: 121.97,30.63 133.78,18.82 165.28,18.82 J3.2 | 121.97,30.63 121.59,30.63 C3.+ 121.97,30.63 | 87.3,63.65 87.68,63.65 87.94,63.9 88.32,63.9 R2-PINH1.2 | 87.3,63.65 86.16,63.65 R1_PINH1.2 86.03,63.65 54.28,63.65 50.13,59.5 42.2,59.5 40.28,61.42 Q2.3 35.04,61.42 34.59,60.98 R_CL1.2 34.47,60.98 34.09,60.98 32.47,59.36 32.47,57.4 | 87.3,63.65 87.3,58.82 U3.2 87.43,58.69 87.43,57.55 89.46,55.52 89.46,48.53 87.43,46.5 87.43,44.85 D7.2 88.45,44.85 92.1,48.5 92.1,54.3 98.53,60.73 120.07,60.73 | 120.07,60.73 120.07,42.82 121.16,41.72 C1_BAT2.2 121.34,41.53 121.34,38.5 IC4.5 121.34,38.37 121.34,38.12 122.1,37.36 122.1,36.09 121.97,35.96 121.97,30.63 | 120.07,60.73 TP16.TP | 31.93,53.36 31.8,53.23 31.29,53.23 U1.3 | 28.12,37.36 26.85,37.36 26.72,37.48 R5.2 26.59,37.48 26.58,37.48 26.58,36.12 25.6,35.14 23.47,35.14 22.12,36.49 R9.2 22.02,37.36 21.89,37.36 20.82,36.29 19.42,36.29 18.35,37.36 17.58,37.36 R7.2 17.45,37.36 17.45,37.1 16.69,36.34 14.91,36.34 13.77,37.48 13.39,37.48 R10.2 13.39,37.36 13.39,37.1 12.62,36.34 10.59,36.34 9.58,37.36 | 28.12,37.36 28.88,37.36 R1.1 | 9.58,37.36 8.94,37.36 R6.2 | v32.94,52.34 31.93,53.36 | 28.12,37.36 v28.12,37.48 | R_RESET.2 67.74,107.72 67.74,107.46 63.92,103.64 63.92,101.16 62.48,99.71 62.28,99.71 IC1.2 62.15,99.71 62.03,99.84 53.26,99.84 45.39,107.72 45.01,107.72 R_CHANGE.2 44.88,107.72 v43.74,107.72 | R_BOOT.2 19.74,107.72 v19.74,89.55 20.5,88.79 20.88,88.79 C9.2 | 8.69,69.62 8.81,69.62 R8.2 | 9.07,45.23 9.07,44.6 U2.2 | 8.69,69.62 8.69,86.25 v8.81,86.38 8.81,88.09 6.45,90.45 J4.P4 | R8.2 8.71,69.62 8.69,69.62
  Top 0.305: 9.58,37.36 9.83,37.61 9.83,43.07 9.07,43.83 9.07,44.47 U2.2 | 31.93,53.36 32.47,53.9 32.47,57.4 | v11.8,48 9.07,45.27 U2.2 | U1.7 U1.8 37.4,57.4 32.47,57.4 | R8.2 8.64,69.4 v7.2,69.4
  Bottom 0.305: v32.94,52.34 28.12,47.52 v28.12,37.48 | v8.81,86.38 11.99,89.55 v19.74,89.55 37.9,107.72 v43.74,107.72 | v7.2,69.4 8.4,69.4 11.4,66.4 11.4,63.2 16.8,57.8 16.8,49 15.8,48 v11.8,48
32KHZ  (via drill 0.3)
  Top 0.15: U3.1 88.57,58.82 88.57,59.84 89.71,60.98 89.71,63.9 R2-PINH1.1 89.71,64.03 89.71,64.41 75.87,78.25 49.45,78.25 v31.8,60.6 | v28.63,56.03 18.08,45.48 18.08,44.6 U2.9
  Bottom 0.15: v28.63,56.03 28.63,57.42 v31.8,60.6
DN
  Top 0.15: J2.A7 164.01,54.5 164.51,54.5 164.73,54.28 164.73,53.82 164.4,53.49 164.01,53.49 J2.B7 163.88,53.49 163.25,53.49 163.03,53.7 159.53,53.7 158.93,53.11 154.86,53.11 D1.4
DP
  Top 0.15: 162.99,54.88 162.99,54.12 163.12,53.99 163.88,53.99 J2.A6 | 162.99,54.88 163.12,55.01 163.88,55.01 J2.B6 | 162.99,54.88 162.87,55.01 154.86,55.01 D1.6
EPD_3V3  (via drill 0.3)
  Top 0.305: J1.16 84.12,15.01 84.51,15.01 J1.15 84.63,15.01 84.63,15.64 v84.51,15.77 | 72.19,38.25 72.31,38.12 72.31,32.02 C7.2 72.44,31.77 83.36,31.77 89.46,25.67 89.46,24.15 89.84,23.77 90.22,23.77 EPD_C5.1 90.35,23.64 90.35,23.39 v89.37,22.41 | 53.39,41.29 69.77,41.29 72.19,38.88 72.19,38.25 | Q2.2 40.06,59.2 40.06,54.17 43.02,51.2 43.23,51.2 53.13,41.29 53.39,41.29 | 72.19,38.25 L1.2 | v52.5,40.28 52.5,35.71 50.22,33.42 50.22,32.91 TP17.TP | 53.39,41.29 v53.39,41.17
  Bottom 0.305: v84.51,15.77 89.41,20.67 89.41,22.37 v89.37,22.41 | v53.39,41.17 v52.5,40.28
EPD_3V3_C  (via drill 0.3)
  Top 0.305: v32.56,62 42.72,72.16 42.72,76.73 TP13.TP | U2.18 20.8,61.74 20.8,61.2 21.15,60.85 v25.58,60.85 | v33.75,59.92 33.95,59.72 R_CL1.1 36.28,59.72 36.8,59.2 37.98,59.2 Q2.1
  Bottom 0.305: 32.56,61.11 25.83,61.11 v25.58,60.85 | 32.56,61.11 v32.56,62 | 32.56,61.11 v33.75,59.92
EPD_BUSY  (via drill 0.3)
  Top 0.15: v88.01,22.32 87.61,21.92 87.61,15.31 87.55,15.26 87.55,15.01 J1.9 | v35.1,75.46 34.85,75.71 34.85,76.35 34.47,76.73 TP9.TP | v23.8,69.36 16.94,69.36 10.47,62.88 10.47,62.12 U2.26
  Bottom 0.15: v88.01,22.32 88.01,22.55 v35.1,75.46 29.01,69.36 v23.8,69.36
EPD_CS
  Top 0.15: U2.11 20.5,44.47 20.5,39.64 20.12,39.26 20.12,38.88 D6.2 20.24,38.75 22.02,38.75 R9.1 22.15,38.75 22.66,38.75 23.94,40.04 28.87,40.04 30,38.9 30,33.2 24.32,27.52 TP10.TP 18.72,27.45 18.85,27.32 19.61,27.32 19.86,27.07 66.07,27.07 68.63,24.51 68.65,24.51 79.77,13.39 83.39,13.39 84.2,14.2 85.73,14.2 86.09,14.56 J1.12
EPD_DC  (via drill 0.3)
  Top 0.15: v86.54,14.12 86.54,14.88 J1.11 | 12.8,27.45 12.62,27.45 TP11.TP | 12.8,27.45 13.13,27.45 | v12.88,42.95 12.88,44.47 U2.5 | v13.89,26.82 13.44,26.82 12.8,27.45
  Bottom 0.15: v86.54,14.12 86.14,14.12 84.14,12.12 28.59,12.12 v13.89,26.82 12.88,27.83 v12.88,42.95
EPD_RST  (via drill 0.3)
  Top 0.15: v85.78,24.15 85.78,21.48 87.05,20.21 87.05,15.01 J1.10 | v17.45,63.52 16.81,62.88 16.81,62.12 U2.21 | TP12.TP 49.95,60.03 v49.92,60
  Bottom 0.15: v85.78,24.15 49.96,59.96 v49.92,60 45.9,64.03 21.77,64.03 21.26,63.52 v17.45,63.52
FLASH_CS  (via drill 0.3)
  Top 0.15: R5.1 26.59,38.88 v25.45,38.88 24.69,38.88 D9.2 | U1.1 31.17,55.77 30.4,55.77 22.02,47.39 22.02,44.72 21.89,44.6 U2.12 21.77,44.47 21.77,43.83 v22.28,43.33
  Bottom 0.15: v25.45,38.88 25.45,40.15 v22.28,43.33
GDR
  Top 0.15: J1.2 91.11,14.88 91.11,14.24 89.92,13.05 78.6,13.05 78.46,13.05 64.35,13.05 Q3.1 | 62.15,15.13 Q3.1 | R4.2 61.9,11.07 61.9,14.78 Q3.1
GND  (via drill 0.35)
  Top 0.15: U2.29_5 13.64,51.84 14.66,51.84 U2.29_8
  other vias: 23.4,37.4 4.2,78.2 10.4,78.2 14,78.2 33.4,43.2 36,35.6 31.8,34.4 24.6,34.4 151.6,11 151.8,5.4 61.4,104 63,104 60,97.6 61.8,96 33,54.4 83.2,14 84.4,13.6 82.4,12.6 19.6,40.4 14.2,40 14.2,35 154,51.6 150.4,54 150.6,56.2 83.6,33.6 81.8,30.4 22.2,105.6 25.8,105.8 87.6,26 47.2,45.2 7.8,64.6 55,107.8 58.6,107.2 91.12,26.48
  pour Top: 76.76,10.06 76.78,10.08 95.02,10.08 95.04,10.06 95.06,10.04 95.08,10.02 95.08,0.08 170.12,0.08 170.12,67.12 92.18,67.12 92.16,67.14 92.14,67.16 92.12,67.18 92.12,111.12 69.08,111.12 69.08,110.18 69.06,110.16 69.04,110.14 69.02,110.12 18.98,110.12 18.96,110.14 18.94,110.16 18.92,110.18 18.92,111.12 0.08,111.12 0.08,65.68 6.32,65.68 6.34,65.66 6.96,65.04 6.98,65.02 6.98,41.58 6.96,41.56 6.34,40.94 6.32,40.92 0.08,40.92 0.08,0.08 76.72,0.08 76.72,10.02 76.74,10.04
  pour Bottom: 6.96,41.56 6.34,40.94 6.32,40.92 0.08,40.92 0.08,0.08 76.72,0.08 76.72,10.02 76.74,10.04 76.76,10.06 76.78,10.08 95.02,10.08 95.04,10.06 95.06,10.04 95.08,10.02 95.08,0.08 170.12,0.08 170.12,67.12 92.18,67.12 92.16,67.14 92.14,67.16 92.12,67.18 92.12,111.12 69.08,111.12 69.08,110.18 69.06,110.16 69.04,110.14 69.02,110.12 18.98,110.12 18.96,110.14 18.94,110.16 18.92,110.18 18.92,111.12 0.08,111.12 0.08,65.68 6.32,65.68 6.34,65.66 6.96,65.04 6.98,65.02 6.98,41.58
GPIO8
  Top 0.15: R1.2 28.88,38.63 28.25,38.63 27.11,39.76 24.25,39.76 22.61,38.12 21.71,38.12 20.79,37.2 20.79,36.76 20.67,36.64 19.57,36.64 18.7,37.51 18.7,43.94 19.23,44.47 U2.10
I2C_PW  (via drill 0.3)
  Top 0.15: C2.2 155.48,7.86 SENSOR2.6 155.25,8.15 155.25,8.78 154.48,9.54 | 154.48,9.54 154.48,10.94 SENSOR2.2 | 154.48,9.54 153.72,8.78 153.72,8.15 SENSOR2.8 153.59,8.02 150.16,8.02 C1.2 150.04,8.02 141.91,8.02 120.83,29.1 86.53,29.1 65.07,50.57 v50.72,50.57 | R2-PINH.2 19.36,67.58 19.86,67.58 21.39,66.06 21.39,65.81 21.26,65.68 R1_PINH.2 21.13,65.55 21.13,65.17 21.77,64.53 21.77,63.52 | 21.77,63.52 21.77,62.12 U2.17 | 21.77,63.52 v21.89,63.52
  Bottom 0.15: v50.72,50.57 37.64,63.65 22.02,63.65 v21.89,63.52
INT_RTC  (via drill 0.3)
  Top 0.15: R1_PINH1.1 86.16,62.25 86.16,58.82 U3.3 86.03,58.69 86.03,57.55 82.98,54.5 v40.56,54.5 | v16.69,39.26 16.69,44.47 U2.8 | v16.69,24.66 16.69,23.13 15.55,21.99 15.55,21.36 TP15.TP
  Bottom 0.15: v16.69,24.66 v16.69,39.26 30.28,52.85 38.28,52.85 39.93,54.5 v40.56,54.5
IO/BOOT
  Top 0.15: R_BOOT.1 19.86,108.98 21.26,108.98 21.64,109.37 22.15,109.37 BOOT_BUTTON.4 22.28,109.37 23.55,109.37 24.31,108.6 | C6.2 27.99,109.11 26.09,109.11 25.83,109.37 BOOT_BUTTON.3 25.7,109.37 25.07,109.37 24.31,108.6 | 24.31,108.6 24.31,62.12 U2.15
IO/CHANGE
  Top 0.15: C10.2 52.76,109.11 50.98,109.11 50.72,109.37 CHANGE_BUTTON.3 50.6,109.37 47.3,109.37 CHANGE_BUTTON.4 47.17,109.37 46.91,109.11 45.01,109.11 R_CHANGE.1 44.88,109.11 44.5,109.11 41.06,105.67 41.06,75.74 41.07,75.73 41.07,75.71 25.7,60.34 15.16,60.34 14.28,61.23 14.28,62 U2.23
MISO  (via drill 0.3)
  Top 0.15: TP6.TP 3.99,100.35 4.62,100.35 5.77,101.49 11.48,101.49 12.24,100.73 12.24,99.1 v7.2,94.06 6.89,93.75 J4.P7 | R8.1 8.94,68.34 10.85,68.34 10.97,68.22 D12.2 11.1,68.09 11.1,67.71 v11.48,67.33 9.07,64.92 9.07,62.12 U2.27 | v29.77,54.5 31.17,54.5 U1.2
  Bottom 0.15: v29.77,54.5 24.31,54.5 v11.48,67.33 7.2,71.61 v7.2,94.06
MOSI  (via drill 0.3)
  Top 0.15: 9.95,99.96 TP7.TP 8.68,97.9 5.8,97.9 3.7,95.8 3.7,90.3 4.65,89.35 J4.P3 5.25,89.3 6.5,89.3 8.18,87.62 8.18,86 8.18,85.9 v8.18,72.03 | R7.1 17.45,38.75 15.67,38.75 D11.2 15.55,38.88 15.42,39.01 15.42,44.47 U2.7 15.55,44.6 15.55,45.36 25.2,55.01 | J1.14 85.14,15.01 85.14,15.74 78.14,22.74 70.81,22.74 68.76,24.79 68.75,24.79 52.83,40.71 50.28,40.71 U1.5 38.91,51.96 38.28,51.96 37.52,51.2 33.2,51.2 32.94,51.45 32.94,51.58 31.8,52.72 30.53,52.72 30.4,52.85 30.4,53.61 30.66,53.87 31.67,53.87 32.06,54.25 32.06,56.15 31.67,56.53 26.72,56.53 25.2,55.01 | 25.2,55.01 v25.07,55.14
  Bottom 0.15: v25.07,55.14 v8.18,72.03
N$1
  Top 0.15: R2-USB1.2 160.32,53.11 163.88,53.11 J2.A5
N$2
  Top 0.15: R2-USB.1 160.32,56.03 163.88,56.03 J2.B5
N$3  (via drill 0.3)
  Top 0.15: IC4.3 118.54,36.59 119.05,36.59 119.43,36.98 v119.43,37.99 118.92,38.5 118.54,38.5 IC4.1 | 135.43,39.14 138.61,39.14 Q1.2 | 135.43,39.14 135.31,39.14 D2.1 135.43,39.14 | 134.42,40.15 134.42,41.68 135.31,42.56 135.31,43.96 C1_BAT1.2 | 135.43,39.14 134.42,40.15 | 134.42,40.15 v134.29,40.02
  Bottom 0.15: v119.43,37.99 132.26,37.99 v134.29,40.02
N$5
  Top 0.15: 67.8,19.45 67.87,19.45 D4.1 | C4.2 62.92,21.48 65.77,21.48 67.8,19.45 | D3.2 55.8,21.48 57.33,21.48 62.3,16.51 63.4,16.51 | 63.42,16.53 63.41,16.51 63.4,16.51 | 63.4,16.51 66.34,19.45 67.8,19.45
N$6  (via drill 0.3)
  Top 0.15: v166.29,12.72 CHG_LED.C | v132.26,46.76 131.88,47.14 131.5,47.14 R1_BAT.1
  Bottom 0.15: v166.29,12.72 163.5,12.72 132.26,43.96 v132.26,46.76
N$7
  Top 0.15: R1_BAT.2 131.5,48.53 131.5,51.2 MCP73831.1
N$8
  Top 0.15: R2_BAT.2 128.83,48.53 128.83,51.2 MCP73831.5
N$9  (via drill 0.3)
  Top 0.15: v80.06,20.21 80.06,15.01 J1.24 | v78.92,23.13 78.92,23.26 78.41,23.77 78.03,23.77 EPD_C12.1
  Bottom 0.15: v80.06,20.21 80.06,21.99 v78.92,23.13
N$10
  Top 0.15: IC1.5 65.08,100.73 68.12,100.73 68.63,100.22 69.01,100.22 C_DELAY.2
N$11
  Top 0.15: J1.5 89.59,15.01 89.59,20.85 92.13,23.39 92.13,23.64 EPD_C2.1
N$12  (via drill 0.3)
  Top 0.15: v81.08,19.2 81.08,15.01 J1.22 | v81.48,22.41 81.46,22.43 81.46,23.64 EPD_C10.1
  Bottom 0.15: v81.48,22.41 81.48,19.6 v81.08,19.2
N$14  (via drill 0.3)
  Top 0.15: v82.09,18.18 82.09,15.01 J1.20 | v84.51,22.41 84.89,22.79 84.89,23.77 EPD_C8.1
  Bottom 0.15: v82.09,18.18 82.09,18.99 84.51,21.41 v84.51,22.41
N$15  (via drill 0.3)
  Top 0.15: v82.6,17.67 82.6,15.01 J1.19 | v86.28,22.41 86.66,22.79 86.66,23.64 EPD_C7.1
  Bottom 0.15: v82.6,17.67 82.6,18.72 v86.28,22.41
N$16  (via drill 0.3)
  Top 0.15: v83.11,17.16 83.11,15.01 J1.18 | v87.17,22.32 88.54,23.68 EPD_C6.1
  Bottom 0.15: v83.11,17.16 83.11,18.25 v87.17,22.32
N$18
  Top 0.15: J1.4 90.09,15.01 90.09,19.58 93.9,23.39 93.9,23.64 EPD_C1.1
N$23
  Top 0.15: D7.1 87.43,42.82 90.35,42.82 93.14,45.61 93.52,45.61 R_CAPACITOR.2
PREVGH  (via drill 0.3)
  Top 0.15: v81.59,18.69 81.59,15.01 J1.21 | v82.73,22.41 83.11,22.79 83.11,23.64 | 83.11,23.64 83.11,23.77 EPD_C9.1 83.11,23.64 | 83.11,23.64 82.73,23.64 82.22,24.15 82.22,25.67 81.97,25.93 77.39,25.93 75.49,24.02 71.55,24.02 D5.1
  Bottom 0.15: v82.73,22.41 82.73,20.46 81.59,19.31 v81.59,18.69
PREVGL  (via drill 0.3)
  Top 0.15: v80.57,19.7 80.57,15.01 J1.23 | v80.39,22.41 79.81,22.99 79.81,23.64 EPD_C11.1 | v73.08,19.45 71.55,19.45 D4.2
  Bottom 0.15: v80.39,22.41 80.57,22.23 v80.57,19.7 80.31,19.45 v73.08,19.45
RESE
  Top 0.15: J1.3 90.6,15.01 90.6,15.51 90.73,15.64 91.87,15.64 92.13,15.39 92.13,14.37 88.95,11.2 64.19,11.2 R3.2 63.5,10.51 61.06,10.51 60.61,10.96 60.61,14.73 61.9,16.02 62.66,16.02 63.54,15.14 Q3.2 63.55,15.26
RESE'
  Top 0.15: R2.2 61.9,7 61.9,7.39 64.19,9.67 R3.1 66.34,7.48 66.34,7.26 SJ1.2
RESET
  Top 0.15: 62.28,100.73 IC1.1 62.25,102.35 56.8,107.8 56.8,108.6 57.28,109.08 C5.2 60.38,109.11 62.03,109.11 RESET_BUTTON.4 62.41,109.37 65.71,109.37 RESET_BUTTON.3 65.84,109.37 66.09,109.11 67.62,109.11 R_RESET.1 67.74,109.11 68.12,109.11 68.5,108.73 68.5,107.21 64.28,102.98 64.28,99.3 62.92,97.94 62.12,97.94 41.35,77.17 41.35,75.6 15.43,49.68 14.66,49.68 10.47,45.48 10.47,44.6 U2.3
RTC_RST  (via drill 0.3)
  Top 0.15: v23.67,63.14 23.42,63.14 23.17,62.88 23.17,62.12 U2.16 | U3.4 84.76,58.82 84.76,59.46 84,60.22 79.43,60.22 78.32,59.11 41.44,59.11 41.39,59.16 v41.16,59.16
  Bottom 0.15: v41.16,59.16 37.18,63.14 v23.67,63.14
RX  (via drill 0.3)
  Top 0.15: v17.2,67.08 13,62.88 13,62.12 U2.24 | v55.42,77.36 55.55,77.23 55.68,77.23 56.06,76.85 56.57,76.85 TP2.TP
  Bottom 0.15: v17.2,67.08 19.61,67.08 29.9,77.36 v55.42,77.36
SCK  (via drill 0.3)
  Top 0.15: 16.94,99.97 17.58,99.97 TP8.TP 14.7,100 6.25,91.55 J4.P5 5.65,91.1 7.9,91.1 12.12,86.88 v12.12,65.17 | 8.56,38.75 6.91,38.75 D10.2 | 8.56,38.75 8.81,38.75 R6.1 8.56,38.75 | v11.86,41.29 14.15,43.58 14.15,44.47 U2.6 | 8.56,38.75 v9.32,39.52 | J1.13 85.65,15.01 85.65,15.64 78.27,23.02 70.93,23.02 68.88,25.07 68.86,25.07 43.08,50.85 42.88,50.85 40.49,53.23 39.03,53.23 U1.6 38.91,53.23 38.28,53.23 v38.15,53.36
  Bottom 0.15: v9.32,39.52 11.1,41.29 v11.86,41.29 11.86,42.56 22.66,53.36 | v38.15,53.36 22.66,53.36 | v12.12,65.17 12.12,63.9 22.66,53.36
SCL  (via drill 0.3)
  Top 0.15: R2-PINH.1 17.96,67.58 17.96,62.12 U2.20 18.08,62 18.08,61.23 18.47,60.85 v20.37,60.85 | v163.63,24.1 163.63,29.7 141.68,51.65 v141.22,51.65 140.35,51.65 U4.7 140.26,51.71 | v164.64,21.48 165.28,20.85 J3.4 | v160.45,16.4 156.13,12.08 156.13,11.07 SENSOR2.4 | v88.95,50.95 88.7,50.69 88.7,49.55 U3.16 88.7,49.42 88.7,48.41 88.32,48.03 87.05,48.03 86.66,48.41 86.66,50.69 86.28,51.07 v49.58,51.07
  Bottom 0.15: v163.63,24.1 164.64,23.08 v164.64,21.48 160.45,17.29 v160.45,16.4 | v88.95,50.95 140.51,50.95 v141.22,51.65 | v20.37,60.85 23.17,60.85 29.01,55.01 45.64,55.01 v49.58,51.07
SDA  (via drill 0.3)
  Top 0.15: 19.99,65.55 R1_PINH.1 | U2.19 19.23,62.12 19.23,62.76 19.99,63.52 19.99,65.5 R1_PINH.1 | 140.26,52.22 U4.8 | SENSOR2.3 155.37,11.07 155.37,11.96 160.32,16.91 165.72,16.91 166.2,17.4 166.2,19.16 165.53,19.83 165.41,19.83 J3.3 165.28,19.7 164.64,19.7 164.13,20.21 164.13,29.87 141.8,52.2 140.31,52.2 U4.8 | v88.95,52.22 87.43,50.69 87.43,49.55 U3.15 | v139.62,52.72 140,52.72 140.13,52.6 140.13,52.34 U4.8 | v19.99,66.82 19.91,66.74 R1_PINH.1
  Bottom 0.15: v139.62,52.72 139.12,52.22 v88.95,52.22 64.57,76.6 29.77,76.6 v19.99,66.82
SRC  (via drill 0.3)
  Top 0.15: 67.62,23.9 67.87,23.9 D5.2 67.62,23.9 | 67.62,23.9 67.36,23.9 66.22,22.75 62.92,22.75 C4.1 62.79,22.75 62.41,22.75 62.03,22.37 62.03,21.1 62.92,20.21 62.92,17.29 Q3.3 | v67.62,34.38 67.62,38.25 L1.1 | 67.62,23.9 v67.62,24.78
  Bottom 0.15: v67.62,24.78 v67.62,34.38
SS_SD  (via drill 0.3)
  Top 0.15: R10.1 13.26,38.75 11.35,38.75 D8.2 11.35,38.88 11.35,44.22 11.61,44.47 U2.4 11.61,44.6 11.35,44.85 v11.35,45.74 | J4.P2 5.6,88.24 6.23,87.6 v6.23,68.26
  Bottom 0.15: v6.23,68.26 9.6,64.89 9.6,47.2 11.06,45.74 v11.35,45.74
TX  (via drill 0.3)
  Top 0.15: v22.66,68.85 17.7,68.85 11.73,62.88 11.73,62.12 U2.25 | v62.28,76.09 62.92,76.73 63.55,76.73 TP1.TP
  Bottom 0.15: v22.66,68.85 29.9,76.09 v62.28,76.09
USB_D+  (via drill 0.3)
  Top 0.305: v143.69,53.49 145.21,55.01 152.32,55.01 D1.1 | v28.63,40.53 28.37,40.53 24.44,44.47 U2.14
  Bottom 0.15: 137.47,47.26 v143.69,53.49
  Bottom 0.305: 137.47,47.26 113.8,47.26 113.59,47.26 112.66,47.26 88.8,23.4 88.8,21.8 83.66,16.66 52.5,16.66 v28.63,40.53
USB_D-  (via drill 0.3)
  Top 0.305: v59.49,51.71 v43.23,51.71 | 152.32,53.11 D1.3 152.28,52.98 v140.51,52.98 | U2.13 23.04,44.6 23.04,45.23 25.16,47.35 v28.67,47.35
  Bottom 0.15: 139.24,51.71 v140.51,52.98
  Bottom 0.305: v59.49,51.71 139.24,51.71 | v28.67,47.35 33.02,51.71 v43.23,51.71
VBAT
  Top 0.305: 131.5,53.23 131.5,55.77 | 131.5,55.77 131.5,55.9 C2_BAT.2 131.5,55.77 | 131.5,55.77 131.88,55.77 135.81,59.71 135.81,60.98 TP3.TP | U4.2 138.35,51.71 138.35,51.33 U4.3 138.23,51.2 137.59,51.2 137.34,50.95 | 137.34,50.95 137.34,50.57 140.77,47.14 140.77,40.02 Q1.3 | 131.5,53.23 135.05,53.23 137.34,50.95 | 131.5,53.23 MCP73831.3
VBUS
  Top 0.305: 137.72,41.17 138.48,41.17 138.61,41.04 Q1.1 | 137.72,41.17 135.31,41.17 D2.2 | 137.72,44.85 138.1,45.23 138.61,45.23 R1_PWRUSB.1 | 137.72,41.17 137.72,44.85 | 137.72,44.85 136.32,46.25 130.99,46.25 130.48,46.76 130.48,50.95 128.83,52.6 128.83,53.11 MCP73831.4 128.7,53.23 128.7,55.9 C1_BAT.2 128.83,56.03 129.34,56.03 130.48,57.17 130.48,57.68 135.18,62.38 141.78,62.38 143.05,61.11 143.81,61.11 TP14.TP 143.94,60.98 147.75,60.98 153.85,54.88 153.85,53.99 153.97,53.87 | 169.6,14.24 165.41,14.24 C5_USB.2 165.28,14.24 162.87,14.24 C4_USB.2 | 169.6,14.24 CHG_LED.A | 153.97,53.87 154.74,53.87 D1.5 | 153.97,53.87 153.34,53.23 153.34,52.6 151.56,50.82 151.18,50.82 150.55,50.18 150.55,48.66 PFMF.050.1.2 150.55,48.53 150.55,47.14 166.81,30.87 166.81,15.79 167.5,15.1 168.8,15.1 169.6,14.3 169.6,14.24
VRTC
  Top 0.305: 93.52,49.17 93.52,49.3 C8.1 93.52,49.17 | 93.52,49.17 93.52,46.88 | 93.52,49.17 97.71,49.17 C10_SUPERCAP.2 | 93.52,46.88 93.14,46.88 90.35,44.09 86.79,44.09 86.16,44.72 86.16,49.42 U3.14 | 93.52,46.88 R_CAPACITOR.1
VUSB
  Top 0.305: J2.A4 164.01,51.84 164.01,51.96 J2.B9 | J2.A9 164.01,56.79 164.01,56.66 J2.B4 164.01,56.53 164.59,56.53 165.16,55.96 165.16,52.61 164.64,52.09 164.01,52.09 J2.B9 | J2.B9 163.88,51.96 161.98,51.96 159.44,49.42 155.88,49.42 155.12,48.66 PFMF.050.1.1